# Altium PCB PCB2.PcbDoc
Units mm, origin at the board's own origin, x right, y up, seen from the top; angles counter-clockwise.
Board outline 99 x 85 mm, 2 copper layers (Top Layer, Bottom Layer); 54 components, 65 nets, 233 pads, 11 vias.
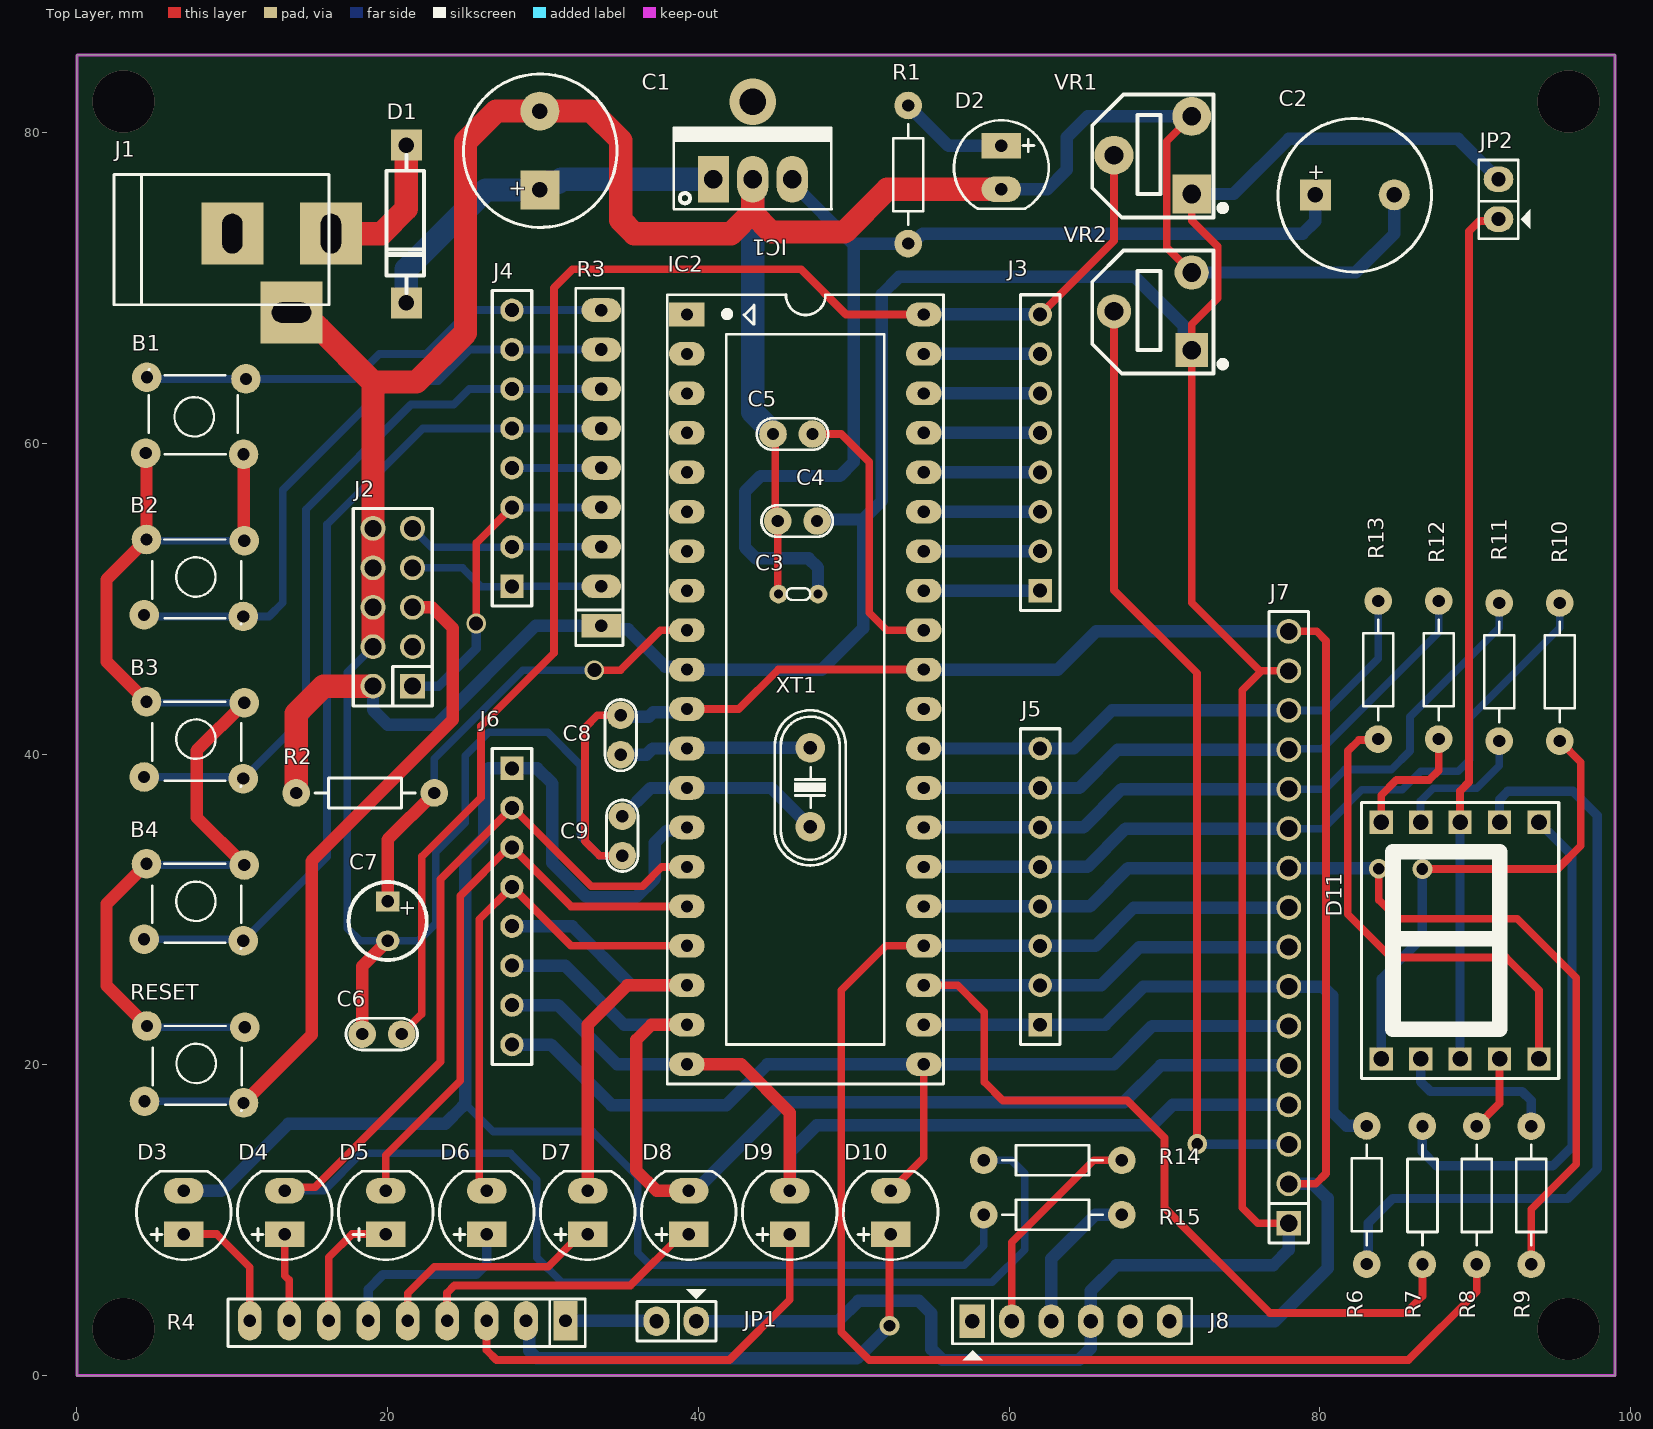
[diagram p0: Top Layer view]
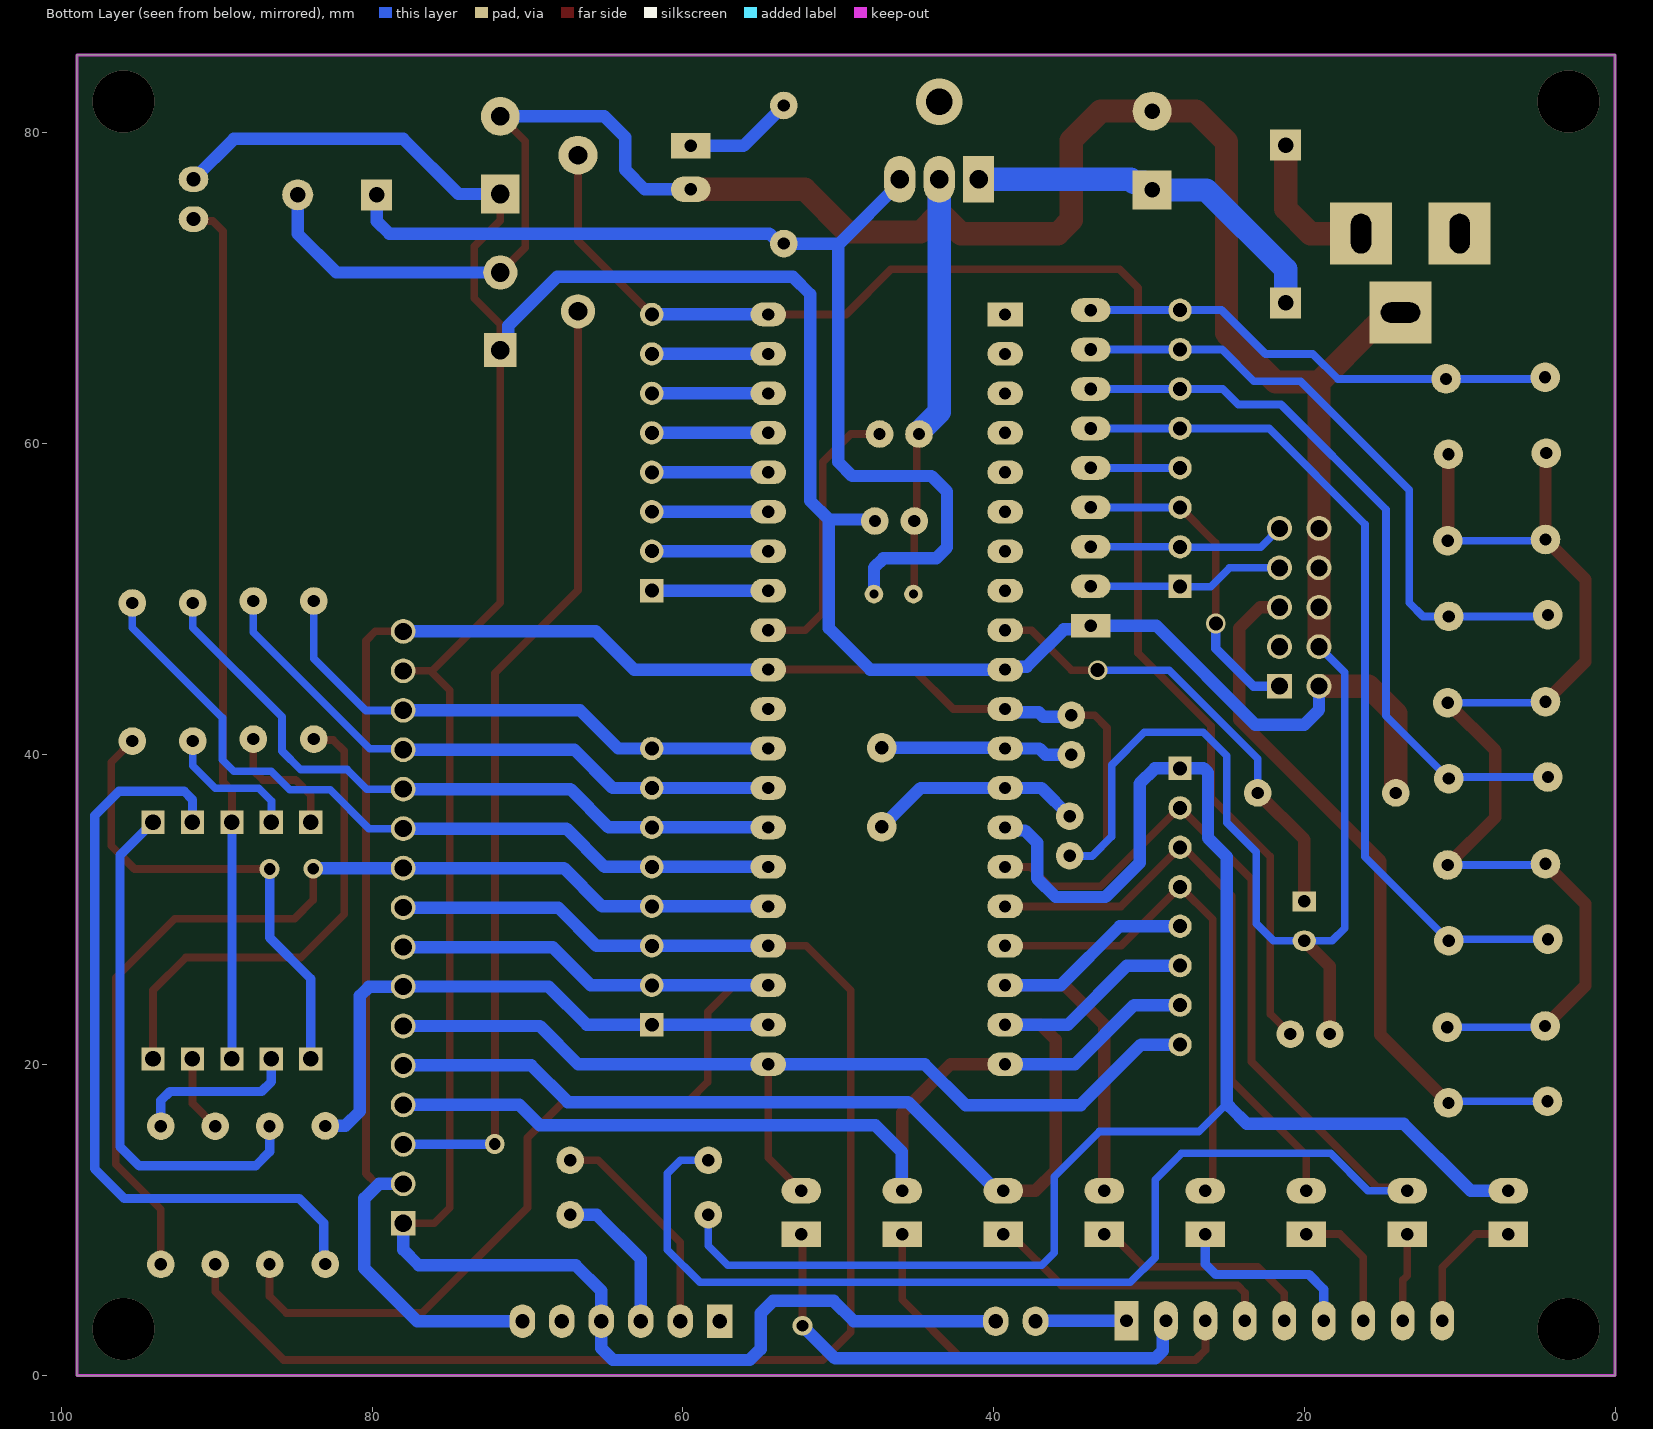
[diagram p1: Bottom Layer view, seen from below]
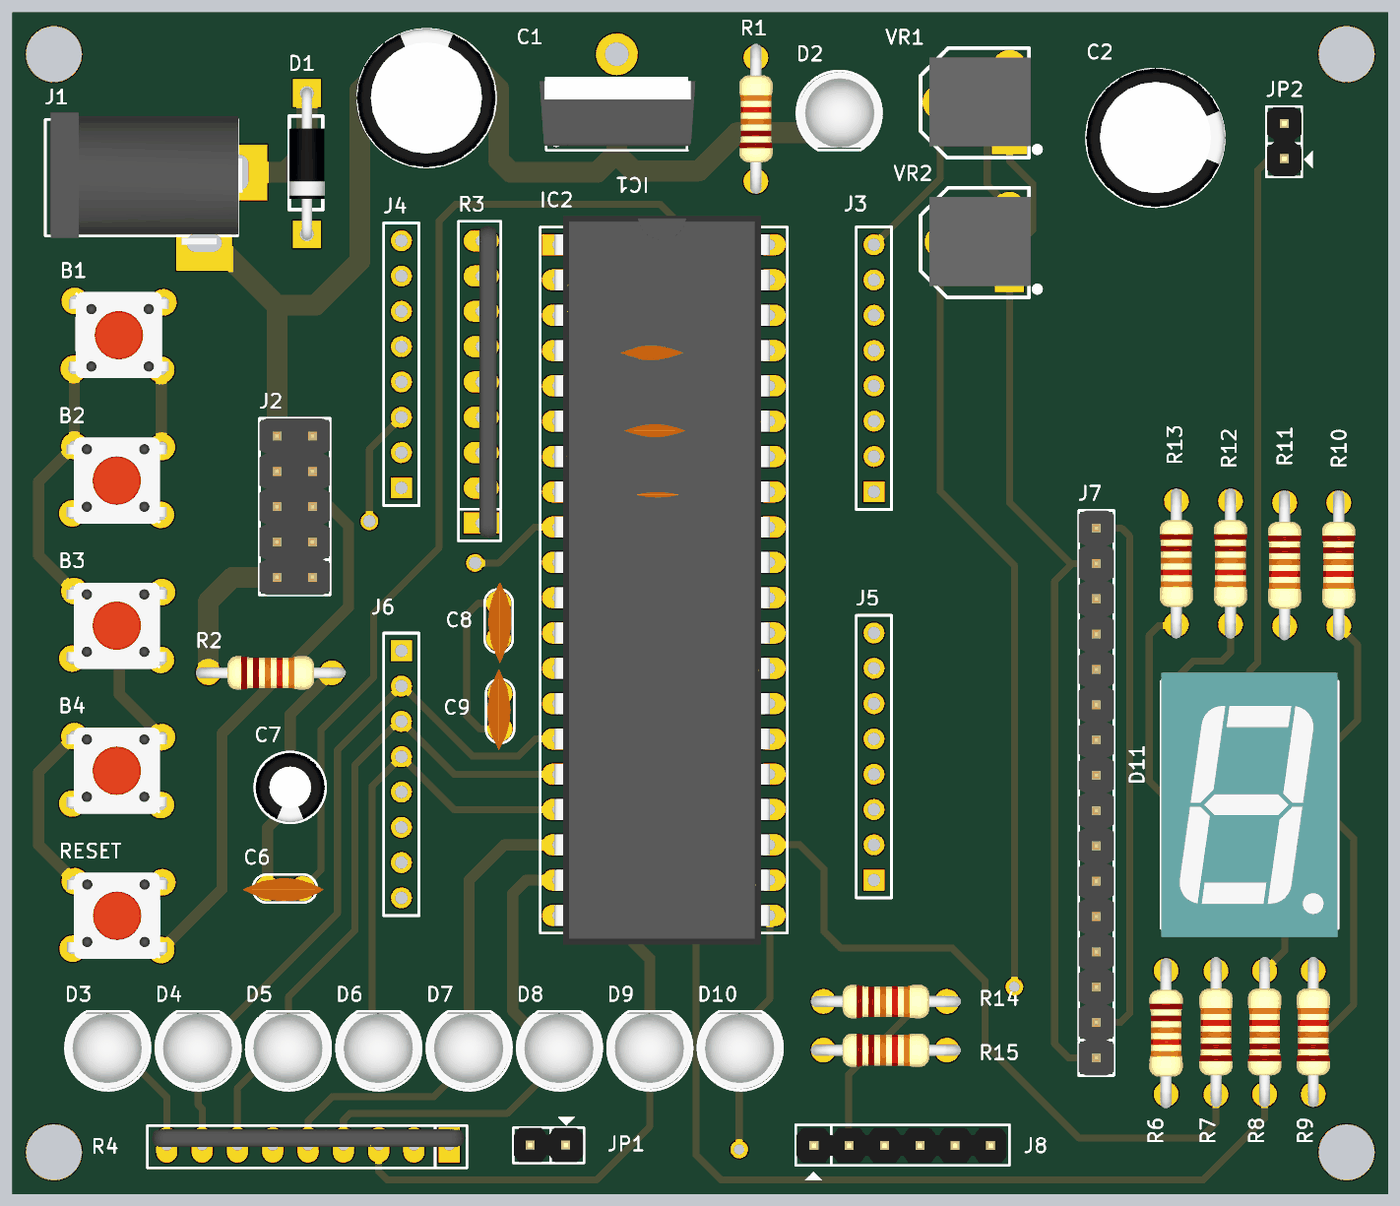
[diagram p2: 3D render of the assembled board from above, using the file's embedded part models]

## Layer stack, top to bottom
Top Solder: solder mask 0.0102, Solder Resist, Dk 3.5
Top Layer: signal copper 0.0356
Dielectric 1: dielectric 0.32, FR-4, Dk 4.8
Bottom Layer: signal copper 0.0356
Bottom Solder: solder mask 0.0102, Solder Resist, Dk 3.5

## Board outline
0,0 99,0 99,85 0,85

## Design rules (kind name [scope] priority, off if disabled: settings)
Clearance [All] p1: gap=0.3 ignorepadtopadclearanceinfootprint=FALSE
PolygonConnect [All] p1: connectstyle=Relief reliefconductorwidth=0.254 reliefentries=4 polygonreliefangle="90 Angle" airgapwidth=0.254
RoutingVias [All] p1: holewidth=0.9 width=1.27 viastyle="Through Hole" minholewidth=0.811 minwidth=1.27 maxholewidth=1 maxwidth=1.3
SolderMaskExpansion [All] p1: expansion=0.102 istentingtop=FALSE
Width [All] p1: maxlimit=1.5 minlimit=0.4 preferedwidth=0.5
30 further rules are at their usual default settings.

## Components (designator, comment, footprint, x,y, rotation, side; value= is the part's Value field where it differs from the comment)
B1 "SW" SW4 10.723,59.297 r180 top value="Button chip 4 pin"
B2 "SW" SW4 4.475,53.812 r0 top value="Button chip 4 pin"
B3 "SW" SW4 4.475,43.375 r0 top value="Button chip 4 pin"
B4 "SW" SW4 4.475,32.938 r0 top value="Button chip 4 pin"
C1 "100uF/35V" C10mm#1 29.8,78.85 r90 top
C2 "100uF/35V" C10mm#2 82.25,76 r0 top
C3 "Capacitor Ceramic" Tu-pico 45.16,50.3 r0 top value=100nF/50V
C4 "100n/50V" CN1 47.64,55 r180 top value=100pF
C5 "100n/50V" CN1 47.34,60.6 r180 top value=100pF
C6 "100n/50V" CN1 20.9,21.975 r180 top value=100pF
C7 "10uF/16V" C5mm 20,29.25 r270 top
C8 "22pF" CN1 35,42.5 r270 top value=100pF
C9 "22pF" CN1 35.1,33.46 r90 top value=100pF
D1 "Diode Power" DIODE/POW/1A 21.2,79.2 r270 top
D2 "LED" LED-5TRED 59.5,77.75 r270 top value="LED 3 ly Single Colour"
D3 "LED" LED-5TRED 6.875,10.5 r90 top value="LED 3 ly Single Colour"
D4 "LED" LED-5TRED 13.375,10.5 r90 top value="LED 3 ly Single Colour"
D5 "LED" LED-5TRED 19.875,10.5 r90 top value="LED 3 ly Single Colour"
D6 "LED" LED-5TRED 26.375,10.5 r90 top value="LED 3 ly Single Colour"
D7 "LED" LED-5TRED 32.875,10.5 r90 top value="LED 3 ly Single Colour"
D8 "LED" LED-5TRED 39.375,10.5 r90 top value="LED 3 ly Single Colour"
D9 "LED" LED-5TRED 45.875,10.5 r90 top value="LED 3 ly Single Colour"
D10 "LED" LED-5TRED 52.375,10.5 r90 top value="LED 3 ly Single Colour"
D11 "7SEG-A" LED7SEG 89,28 r0 top
IC1 "LM7805" QTO-220 40.96,77 r0 top
IC2 "ATmega16" DIP40/W0.6 39.258,68.298 r270 top value="Atmega 16L"
J1 "DC 9-12V" DC-IN 13.175,70.96 r0 top value="Jac DC"
J2 "JP5x2" JP5-D2T 20.325,49.45 r90 top
J3 "PA" HDR1X8 62,50.518 r90 top
J4 "PB" HDR1X8 28,50.8 r90 top
J5 "PC" HDR1X8 62,22.578 r90 top
J6 "PD" HDR1X8 28,39.08 r270 top
J7 "JP16" JP16-D1T 78,9.8 r90 top
J8 "JP6 PIN" JP6 57.63,3.5 r0 top value=JP7
JP1 "Jumper 2" JP2 39.865,3.5 r180 top value="JP 2"
JP2 "Jumper 2" JP2 91.5,74.435 r90 top value="JP 2"
R1 "1k" R1/4W 53.5,81.75 r270 top value="R1/4W - 1K"
R2 "10k" R1/4W 23,37.5 r180 top value="R1/4W - 1K"
R3 "10K" RN8 33.75,48.26 r90 top value="Tro thanh 10K"
R4 "10K" RN8 31.445,3.525 r180 top value="Tro thanh 10K"
R6 "1K" R1/4W 83.015,7.175 r90 top value="R1/4W - 1K"
R7 "1K" R1/4W 86.6,16.05 r270 top value="R1/4W - 1K"
R8 "1K" R1/4W 90.1,16.05 r270 top value="R1/4W - 1K"
R9 "1K" R1/4W 93.6,16.05 r270 top value="R1/4W - 1K"
R10 "1K" R1/4W 95.437,40.838 r90 top value="R1/4W - 1K"
R11 "1K" R1/4W 91.542,40.838 r90 top value="R1/4W - 1K"
R12 "1K" R1/4W 87.648,40.965 r90 top value="R1/4W - 1K"
R13 "1K" R1/4W 83.753,40.965 r90 top value="R1/4W - 1K"
R14 "100R" R1/4W 67.25,13.85 r180 top value="R1/4W - 1K"
R15 "100R" R1/4W 67.25,10.35 r180 top value="R1/4W - 1K"
RESET "SW" SW4 4.5,22.5 r0 top value="Button chip 4 pin"
VR1 "10kΩ" RES-ADJ-SMD_RM065-V1#1 69.586,78.5 r90 top
VR2 "10kΩ" RES-ADJ-SMD_RM065-V1#2 69.586,68.451 r90 top
XT1 "8Mhz" XT2 47.2,37.86 r90 top value=4Mhz

## Footprints (in the part's own frame and the unit in brackets; to place one, negate y for a bottom-side part, rotate by r counter-clockwise, add the part's x,y. Pads: shape width x height; smd on the part's side, far side on the other; paste and mask are expansions set on the pad)
C5mm [mm]
  rect 1.3x1.5 hole 0.8: 1(-1.27,0)
  oval 1.3x1.5 hole 0.8: 2(1.27,0)
  silkscreen extent -2.51,-2.51 2.51,2.51, body extent -2.5,-2.5 2.49,2.5, height 11.01
C10mm#1 [mm]
  rect 2.5x2.5 hole 1: 1(-2.54,0)
  round 2.5 hole 1: 2(2.54,0)
  silkscreen extent -4.95,-4.96 4.93,4.92, body extent -5,-5 4.97,5, height 20.01
C10mm#2 [mm]
  rect 2x2 hole 1: 1(-2.54,0)
  round 2 hole 1: 2(2.54,0)
  silkscreen extent -4.95,-4.96 4.93,4.92, body extent -5,-5 4.97,5, height 20.01
CN1 [mil]
  round 70 hole 31: 1(0,0) 2(100,0)
  silkscreen extent -40,-40 141,40, body extent -60,-30 170,37, height 265
DC-IN [mm] "Jac DC input"
  rect 4x4 hole 1.3 slot 2.54 at 90 deg: 1(3.175,2.54) 2(-3.175,2.54)
  rect 4x4 hole 1.3 slot 2.54 at 0 deg: 3(0.635,-2.54)
  silkscreen extent -10.79,-2.03 3.05,6.35, body extent -10.42,-2.67 3.4,6.84, height 11.02
DIODE/POW/1A [mm]
  rect 2x2 hole 1: 1(0,0) 2(10.16,0)
  silkscreen extent 0.64,-1.27 9.53,1.14, body extent -0.38,-1.28 10.54,1.28, height 2.55
DIP40/W0.6 [mil] "40 PIN, W 600mil, Pin to pin 100mil"
  rect 60x90 hole 31: 1(0,0)
  oval 60x90 hole 31: 2(100,0) 3(200,0) 4(300,0) 5(400,0) 6(500,0) 7(600,0) 8(700,0) 9(800,0) 10(900,0) 11(1000,0) 12(1100,0) 13(1200,0) 14(1300,0) 15(1400,0) 16(1500,0) 17(1600,0) 18(1700,0) 19(1800,0) 20(1900,0) 21(1900,600) 22(1800,600) 23(1700,600) 24(1600,600) 25(1500,600) 26(1400,600) 27(1300,600) 28(1200,600) 29(1100,600) 30(1000,600) 31(900,600) 32(800,600) 33(700,600) 34(600,600) 35(500,600) 36(400,600) 37(300,600) 38(200,600) 39(100,600) 40(0,600)
  silkscreen extent -50,-50 1950,650, body extent -82,-10 1982,600, height 224
HDR1X8 [mm] "Connector; Header; 8 Position"
  rect 1.5x1.5 hole 0.9: 1(0,0)
  round 1.5 hole 0.9: 2(2.54,0) 3(5.08,0) 4(7.62,0) 5(10.16,0) 6(12.7,0) 7(15.24,0) 8(17.78,0)
  silkscreen extent -1.27,-1.27 19.05,1.27, body extent -1.27,-1.27 19.05,1.27, height 7
JP2 [mil]
  oval 65x75 hole 36: 1(0,0) 2(101,0)
  silkscreen extent -50,-81 150,50, body extent -48,-50 148,48, height 323
JP5-D2T [mm] "10 pins, dual pin, straight, gold plating"
  rect 1.6x1.6 hole 1.1: 1(-5.08,-1.27)
  round 1.6 hole 1.1: 2(-2.54,-1.27) 3(0,-1.27) 4(2.54,-1.27) 5(5.08,-1.27) 6(5.08,1.27) 7(2.54,1.27) 8(0,1.27) 9(-2.54,1.27) 10(-5.08,1.27)
  silkscreen extent -6.35,-2.54 6.35,2.54, body extent -6.35,-2.54 6.35,2.54, height 8.55
JP6 [mil] "JP6"
  rect 65x85 hole 36: 1(0,0)
  oval 65x85 hole 36: 2(100,0) 3(200,0) 4(300,0) 5(400,0) 6(500,0)
  silkscreen extent -50,-99 556,58, body extent -48,-50 548,48, height 323
JP16-D1T [mm] "16  pins, 1 row, straight, gold plating"
  rect 1.6x1.6 hole 1.1: 1(0,0)
  round 1.6 hole 1.1: 2(2.54,0) 3(5.08,0) 4(7.62,0) 5(10.16,0) 6(12.7,0) 7(15.24,0) 8(17.78,0) 9(20.32,0) 10(22.86,0) 11(25.4,0) 12(27.94,0) 13(30.48,0) 14(33.02,0) 15(35.56,0) 16(38.1,0)
  silkscreen extent -1.27,-1.27 39.37,1.27, body extent -1.27,-1.27 39.37,1.27, height 8.54
LED7SEG [mm] "LED7SEG"
  round 1.524 on Top Overlay: 0(4.724,-5.334)
  rect 1.5x1.5 hole 1: 1(-5.055,-7.62) 2(-2.515,-7.62) 3(0.025,-7.62) 4(2.565,-7.62) 5(5.105,-7.62) 6(5.105,7.62) 7(2.565,7.62) 8(0.025,7.62) 9(-2.515,7.62) 10(-5.055,7.62)
  silkscreen extent -6.32,-8.89 6.38,8.89, body extent -6.35,-9.52 6.35,9.53, height 8.03
LED-5TRED [mil] "LED 2 PIN, 5 ly , Only colour, pin to pin 110mil"
  rect 65x100 hole 32: 1(-55,0)
  oval 65x100 hole 32: 2(55,0)
  silkscreen extent -120,-120 104,120, body extent -116,-117 98,120, height 339
QTO-220 [mm] "TO-220 - 1-2-3"
  rect 2x3 hole 1.2: 1(0,0)
  oval 2x3 hole 1.2: 2(2.54,0) 3(5.08,0)
  silkscreen extent -2.54,-1.93 7.62,3.3, body extent -3.02,-1.63 8.19,3.06, height 19.17
R1/4W [mil] "R 1/4W, 2 Pin, 350mil"
  round 70 hole 31: 1(0,0) 2(350,0)
  silkscreen extent 48,-38 302,38, body extent -40,-47 386,47, height 111
RES-ADJ-SMD_RM065-V1#1 [mm]
  rect 2.5x2.5 hole 1.2 paste+0 mask+0.05: 1(-2.451,-2.164)
  round 2.5 hole 1.2 paste+0 mask+0.05: 2(0.049,2.836) 3(2.549,-2.164)
  silkscreen extent -3.95,-4.36 3.95,4.24, body extent -3.13,-3.69 3.27,3.61, height 8.1
RES-ADJ-SMD_RM065-V1#2 [mm]
  rect 2.2x2.1 hole 1.2 paste+0 mask+0.05: 1(-2.451,-2.164)
  round 2.2 hole 1.2 paste+0 mask+0.05: 2(0.049,2.836) 3(2.549,-2.164)
  silkscreen extent -3.95,-4.36 3.95,4.24, body extent -3.13,-3.69 3.27,3.61, height 8.1
RN8 [mil] "R SIP8, 9 Pin"
  rect 60x100 hole 32: 1(0,0)
  oval 60x100 hole 32: 2(100,0) 3(200,0) 4(300,0) 5(400,0) 6(500,0) 7(600,0) 8(700,0) 9(800,0)
  silkscreen extent -50,-55 855,65, body extent -43,-44 843,5, height 259
SW4 [mil] "SW button 4pin, 250 x250 mil"
  round 75 hole 31: 1(0,0) 2(245,-195) 3(248,-3) 4(-6,-191)
  silkscreen extent 15,-215 240,0, body extent -36,-220 276,24, height 276
Tu-pico [mm] "Tu gom mini"
  round 1.2 hole 0.6: 1(0,0) 2(2.54,0)
  silkscreen extent 0.51,-0.38 2.03,0.38, body extent -1.65,-0.85 4.19,0.85, height 6.12
XT2 [mil] "Footpin for Crystal 2 pin"
  round 75 hole 34: 1(-100,0) 2(100,0)
  silkscreen extent -198,-90 195,90, body extent -233,-93 213,90, height 138

## Part data
B1 B2 B3 B4 RESET: library part SW4, "Switch button 4 pin"
C1 C2: library part "Cap Pol 8mm", "Polarized Capacitor (Axial)", LatestRevisionDate=17-Jul-2002, LatestRevisionNote="Re-released for DXP Platform.", PackageReference=POLAR0.8, Published=8-Jun-2000, Publisher="Altium Limited"
C3: library part CapCeramic, "Capacitor", LatestRevisionDate=17-Jul-2002, LatestRevisionNote="Re-released for DXP Platform.", PackageReference=RAD-0.3, Published=8-Jun-2000, Publisher="Altium Limited"
C4 C5 C6 C8 C9: library part CN1, "Cap np  1pF - 472pF"
C7: library part "Cap Pol 5mm", "Polarized Capacitor (Axial)", LatestRevisionDate=17-Jul-2002, LatestRevisionNote="Re-released for DXP Platform.", PackageReference=POLAR0.8, Published=8-Jun-2000, Publisher="Altium Limited"
D1: PackageDocument=Aug-1999, ComponentLink1Description="Manufacturer Link", ComponentLink1URL=http://www.fairchildsemi.com/, ComponentLink2Description=Datasheet, ComponentLink2URL=http://www.fairchildsemi.com/ds/1N%2F1N5400.pdf, DatasheetDocument=1998, LatestRevisionDate=17-Jul-2002, LatestRevisionNote="Re-released for DXP Platform.", PackageReference=DO-201AD, Published=8-Jun-2000, Publisher="Altium Limited"
D2 D3 D4 D5 D6 D7 D8 D9 D10: "LED Single colour Green and Red"
D11: library part LED7SEG-A, "14.2 mm General Purpose Blue 7-Segment Display: CA, RH DP, Gray Surface", Colour=Blue, PackageDocument=24-Sep-2002, ComponentLink1Description="Manufacturer Link", ComponentLink1URL=http://www.agilent.com/, DatasheetDocument=24-Sep-2002, LatestRevisionDate=17-Dec-2003, LatestRevisionNote="Schematic revised, PCB Footprint replaced.", MinimumIntensity="2020 ucd", Note="IF = 10 mA", PackageReference=H, Published=8-Jun-2000, Publisher="Altium Limited"
IC1: library part LM78xx, "On ap +, from + 5 to + 24VDC"
IC2: library part ATmega16A-PU, "8-Bit AVR Microcontroller with 16K Bytes of In-System Programmable Flash Memory"
J1: library part DCIN, "Jac DC input"
J2: "WR-PHD 2.54 mm Dual Socket Header", Manufacturer="W¨¹rth Elektronik eiSos GmbH", partNo=61301021821, ComponentLink1 Description=Manufacturer, ComponentLink1URL=http://www.we-online.com, ComponentLink2 Description=Datasheet, ComponentLink2URL=http://katalog.we-online.de/em/datasheet/6130xx21821.pdf, Created by="Karrer Zheng", Created Date="29 March 2013", NoPins=10
J3 J4 J5 J6: library part "Header 8", "Header, 8-Pin", LatestRevisionDate=17-Jul-2002, LatestRevisionNote="Re-released for DXP Platform.", Publisher="Altium Limited"
J7: "WR-PHD 2.54 mm Angled Socket Header", Manufacturer="W¨¹rth Elektronik eiSos GmbH", partNo=613016143121, ComponentLink1 Description=Manufacturer, ComponentLink1URL=http://www.we-online.com, ComponentLink2 Description=Datasheet, ComponentLink2URL=http://katalog.we-online.de/em/datasheet/6130xx143121.pdf, Created by="Karrer Zheng", Created Date="29 March 2013", NoPins=16
J8: library part JP6
JP1 JP2: library part "JP 2"
R1 R2 R6 R7 R8 R9 R10 R11 R12 R13 R14 R15: library part R, "Resistor 1/4W"
R3 R4: library part RN8, "Resistor 8 (Thanh)"
VR1 VR2: library part VR-RM065-103(10K), "VR-10K"
XT1: library part XT2, "Crystal For all Crystal 2pin."

## Via types
v1: diameter 1.27, hole 0.75, Top Layer to Bottom Layer, 4 vias
v2: diameter 4, hole 4, Top Layer to Bottom Layer, 4 vias
v3: diameter 1.27, hole 0.9, Top Layer to Bottom Layer, 2 vias
v4: diameter 3, hole 1.7, Top Layer to Bottom Layer, 1 vias

## Nets (pads, with @x,y where several pads share a name; then routed paths per layer and width w, separated by ;. In a path a pad name is that pad's centre, name@x,y a point inside that pad or via, vN(x,y) a via of type N, cw(c..) or ccw(c..) an arc to the next point about the centre after c; other vN are vias at no path point)
AVR_RX: D3.2 IC2.14 J6.1 R15.2 | length 108.2
  Bottom Layer w0.5: 25,17.5 26.8,15.7 33.2,15.7 36.1,12.8 36.1,7.9 36.9,7.1 57.1,7.1 58.36,8.36 R15.2
  Bottom Layer w0.8: D3.2 9.297,11.897 13.6,16.2 23.7,16.2 24.8,17.3 25,17.5 25,33.4 26.2,34.6 26.2,38.807 26.493,39.1 27.82,39.1 27.92,39 J6.1 29.62,39.08 30.6,38.1 30.6,33 32.8,30.8 36,30.8 37.2,32 37.2,34.3 37.982,35.082 39.062,35.082 IC2.14
AVR_TX: D4.2 IC2.15 J6.2 R14.2 | length 109.3
  Top Layer w0.5: D4.2 13.595,12.117 15.317,12.117 23.4,20.2 23.4,31.94 J6.2 28.06,36.54 33.1,31.5 36.4,31.5 37.638,32.738 IC2.15
  Bottom Layer w0.5: D4.2 15.897,11.897 18.3,14.3 27.9,14.3 29.6,12.6 29.6,7.6 31.2,6 58.9,6 61,8.1 61,13 60.15,13.85 R14.2
FT_RX: J8.2 R14.1 | length 14.3
  Top Layer w0.5: J8.2 60.17,8.57 65.45,13.85 R14.1
FT_TX: J8.3 R15.1 | length 9.7
  Bottom Layer w0.8: J8.3 62.721,3.511 62.721,7.521 65.55,10.35 R15.1
GND: C1.2 C2.2 C3.1 C4.2 C5.2 C6.2 C7.2 C8.1 C9.1 D2.2 IC1.2 IC2.11 IC2.31 J1.3 J2.6 J2.7 J2.8 J2.9 J7.2 J7.16 J8.6 VR1.3 VR2.3 | length 336.8
  Top Layer w0.5: C8.1 33.5,42.5 32.7,41.7 32.7,34.4 33.64,33.46 C9.1 ; IC2.11 42.598,42.898 45.138,45.438 IC2.31 ; C5.2 44.95,60.45 44.95,55.15 C4.2 45.1,50.36 C3.1 ; VR2.3 70.146,72.604 70.146,79.445 VR1.3 ; J7.2 79.74,12.34 80.4,13 80.4,47.3 79.8,47.9 J7.16
  Top Layer w0.8: C6.2 18.36,26.34 C7.2
  Top Layer w1.5: J1.3@14.572,68.42 15.592,67.4 15.6,67.4 19.055,63.945 ; J2.9 J2.8 J2.7 J2.6 19.055,63.945 ; IC1.2 43.5,74.9 ; D2.2 52.153,76.353 49.4,73.6 44.7,73.6 43.5,74.8 43.5,74.9 ; 19.055,63.945 21.845,63.945 25.005,67.105 25.005,79.405 26.99,81.39 C1.2 33.11,81.39 35,79.5 35,74.379 35.879,73.5 42.1,73.5 43.5,74.9
  Bottom Layer w0.5: J2.9 17.4,45.255 17.4,28.8 18.22,27.98 21.98,27.98 23.1,29.1 23.1,33.7 25,35.6 25,39.9 26.5,41.4 30.3,41.4 32.4,39.3 32.4,34.7 33.657,33.443 C9.1@35.002,33.443 ; C8.1 C8.1@35.1,42.4 ; IC2.11@39.062,42.702 IC2.11
  Bottom Layer w0.8: C8.1@35.1,42.4 36.8,42.4 37.102,42.702 IC2.11@39.062,42.702 ; IC2.31 63.138,45.438 65.6,47.9 J7.16 ; D2.2 62.453,76.353 63.7,77.6 63.7,79.7 65.049,81.049 VR1.3 ; J8.6 77.1,3.5 80.5,6.9 80.5,11.4 79.56,12.34 J7.2 ; VR2.3 82.3,71 84.79,73.49 C2.2
  Bottom Layer w1.5: IC1.2@43.5,77.254 IC1.2 43.5,62.018 44.8,60.718 C5.2
MISO: J2.5 J4.2 R3.3 | length 12.7
  Bottom Layer w0.5: J2.5 22.813,53.312 J4.2@28,53.312 ; J4.2 28.09,53.25 28.18,53.34 R3.3
MOSI: J2.1 J4.3 R3.4 | length 21
  Top Layer w0.5: v3(25.7,48.4) 25.7,53.58 J4.3
  Bottom Layer w0.5: J4.3 28.12,56 28.24,55.88 R3.4
  Bottom Layer w0.6: J2.1 23.27,44.37 25.7,46.8 v3(25.7,48.4)
NetB1_1: B1.1 B1.3 B2.1 B2.3 B3.1 B3.3 B4.1 B4.3 RESET.1 RESET.3 | length 74.6
  Top Layer w0.5: B2.3@10.723,53.787 B2.3
  Top Layer w0.8: B1.3 4.475,59.322 B2.1 1.9,51.237 1.9,45.95 B3.1 ; B4.1 1.9,30.363 1.9,25.1 RESET.1 ; B2.3@10.723,53.787 B1.1 ; B4.3 7.7,35.936 7.7,40.225 B3.3
  Bottom Layer w0.5: B4.1 4.551,32.861 B4.3 ; B3.1 4.551,43.299 B3.3 ; B2.1 4.551,53.736 B2.3 ; RESET.1 4.576,22.424 RESET.3
NetC1_1: C1.1 D1.2 IC1.1 | length 24.3
  Bottom Layer w1.5: D1.2 21.2,71.2 26.31,76.31 C1.1 30.3,76.81 30.989,76.81 31.179,77 IC1.1
NetC2_1: C2.1 C3.2 IC1.3 R1.2 | length 70.3
  Bottom Layer w0.8: IC1.3 46.04,76.746 49.926,72.86 ; C3.2 47.7,52 47.1,52.6 43.7,52.6 43,53.3 43,56.9 44,57.9 49.1,57.9 50,58.8 50,72.86 R1.2 ; R1.2@53.36,72.86 53.792,72.86 54.432,73.5 78.9,73.5 79.71,74.31 C2.1
NetC5_1: C5.1 IC2.32 | length 18.1
  Top Layer w0.5: C5.1 49.2,60.6 51,58.8 51,49.1 52.122,47.978 IC2.32
NetC7_1: C7.1 IC2.9 R2.1 | length 30.1
  Top Layer w0.5: v3(33.3,45.4) 34.98,45.4 37.558,47.978 IC2.9
  Top Layer w0.8: C7.1 20,34.5 R2.1
  Bottom Layer w0.5: R2.1 23,39.7 28.7,45.4 v3(33.3,45.4)
NetC8_2: C8.2 IC2.12 XT1.2 | length 12.4
  Bottom Layer w0.8: C8.2 36.66,39.96 37.058,40.358 IC2.12 39.3,40.4 XT1.2
NetC9_2: C9.2 IC2.13 XT1.1 | length 14
  Bottom Layer w0.8: C9.2 36.918,37.818 IC2.13 44.702,37.818 47.02,35.5 47.2,35.5 XT1.1
NetD1_1: D1.1 J1.1 | length 9.6
  Top Layer w1.5: J1.1 19.6,73.5 21.2,75.1 D1.1
NetD2_1: D2.1 R1.1 | length 7.1
  Bottom Layer w0.8: R1.1 56.103,79.147 D2.1
NetD3_1: D3.1 R4.9 | length 8.6
  Top Layer w0.5: D3.1 8.997,9.103 11.125,6.975 R4.9
NetD4_1: D4.1 R4.8 | length 5.7
  Top Layer w0.5: D4.1 13.375,6.434 13.665,6.144 R4.8
NetD5_1: D5.1 R4.7 | length 8.4
  Top Layer w0.5: R4.7 16.205,7.605 17.703,9.103 D5.1
NetD6_1: D6.1 R4.6 | length 12.3
  Bottom Layer w0.6: R4.6 18.745,5.545 19.7,6.5 25.7,6.5 26.375,7.175 D6.1
NetD7_1: D7.1 R4.5 | length 14.9
  Top Layer w0.5: R4.5 21.285,5.285 23,7 30.328,7 31.855,8.527 31.9,8.527 32.476,9.103 D7.1
NetD8_1: D8.1 R4.4 | length 18.9
  Top Layer w0.5: R4.4 23.825,5.325 24.3,5.8 35.628,5.8 38.931,9.103 D8.1
NetD9_1: D9.1 R4.3 | length 27.5
  Top Layer w0.5: R4.3 26.365,1.635 27,1 42,1 45.875,4.875 D9.1
NetD10_1: D10.1 R4.2 | length 32.3
  Top Layer w0.5: v1(52.3,3.2) 52.3,9.028 D10.1
  Bottom Layer w0.8: R4.2 28.8,3.42 29.101,3.119 29.101,1.599 29.6,1.1 50.2,1.1 v1(52.3,3.2)
NetD11_1: D11.1 R10.1 | length 31.4
  Top Layer w0.5: v1(86.6,32.6) 95.3,32.6 96.8,34.1 96.8,39.475 R10.1
  Bottom Layer w0.6: D11.1 83.945,25.545 86.6,28.2 v1(86.6,32.6)
NetD11_2: D11.2 R9.1 | length 10.7
  Bottom Layer w0.6: D11.2 86.485,18.915 87.115,18.285 93.015,18.285 93.6,17.7 R9.1
NetD11_3: D11.3 D11.8 JP2.1 | length 55.7
  Top Layer w0.5: D11.8 89.025,37.625 89.6,38.2 89.6,73.655 90.262,74.317 91.383,74.317 JP2.1
  Bottom Layer w0.6: D11.3 D11.8
NetD11_4: D11.4 R8.1 | length 4.9
  Top Layer w0.5: R8.1 91.565,17.515 D11.4
NetD11_5: D11.5 R13.1 | length 31.5
  Top Layer w0.5: R13.1 83.688,40.9 82.5,40.9 81.8,40.2 81.8,29.7 84.6,26.9 92,26.9 94.105,24.795 D11.5
NetD11_6: D11.6 R7.1 | length 33.9
  Bottom Layer w0.6: R7.1 86.6,14.4 87.5,13.5 95,13.5 96.232,14.732 96.232,33.494 D11.6
NetD11_7: D11.7 R6.1 | length 50.2
  Bottom Layer w0.6: R6.1 83.114,7.274 83.114,9.814 84.7,11.4 95.957,11.4 97.857,13.3 97.857,36.043 96.3,37.6 92.1,37.6 91.565,37.065 D11.7
NetD11_9: D11.9 R11.1 | length 9
  Bottom Layer w0.5: D11.9 86.485,36.985 87.3,37.8 90.1,37.8 91.542,39.242 R11.1
NetD11_10: D11.10 R12.1 | length 8.1
  Top Layer w0.5: D11.10 83.945,37.345 84.937,38.337 87.037,38.337 87.648,38.948 R12.1
NetJ7_3: J7.3 VR2.2 | length 61.7
  Top Layer w0.5: VR2.2 66.75,50.55 72.1,45.2 v1(72.1,14.9)
  Bottom Layer w0.5: v1(72.1,14.9) v1@72.11,14.89 ; J7.3@77.99,14.89 J7.3
  Bottom Layer w0.6: v1@72.11,14.89 J7.3@77.99,14.89
NetJP1_2: JP1.2 R4.1 | length 5.9
  Bottom Layer w0.5: JP1.2@37.275,3.525 JP1.2
  Bottom Layer w0.8: R4.1 JP1.2@37.275,3.525
PA0: C6.1 IC2.40 J3.8 VR1.2 | length 97.3
  Top Layer w0.5: C6.1 22.2,23.275 22.2,33.4 26,37.2 26,41.8 30.7,46.5 30.7,70 31.9,71.2 46.6,71.2 49.502,68.298 IC2.40 ; J3.8 66.75,73.048 VR1.2
  Bottom Layer w0.8: IC2.40 J3.8
PA1: IC2.39 J3.7 | length 7.5
  Bottom Layer w0.8: IC2.39 J3.7
PA2: IC2.38 J3.6 | length 7.5
  Bottom Layer w0.8: IC2.38 J3.6
PA3: IC2.37 J3.5 | length 7.5
  Bottom Layer w0.8: IC2.37 J3.5
PA4: IC2.36 J3.4 | length 7.5
  Bottom Layer w0.8: IC2.36 J3.4
PA5: IC2.35 J3.3 | length 7.5
  Bottom Layer w0.8: IC2.35 J3.3
PA6: IC2.34 J3.2 | length 7.5
  Bottom Layer w0.8: IC2.34 J3.2
PA7: IC2.33 J3.1 | length 7.5
  Bottom Layer w0.8: IC2.33 J3.1
PB0: B1.2 B1.4 J4.8 R3.9 | length 31.2
  Bottom Layer w0.5: B1.2 4.602,64.148 B1.4 17.848,64.148 19.45,65.75 22.5,65.75 25.33,68.58 J4.8 28,68.552 28.028,68.58 R3.9
PB1: B2.2 B2.4 J4.7 R3.8 | length 40.7
  Bottom Layer w0.5: B2.4 4.424,48.859 B2.2 12.359,48.859 13.25,49.75 13.25,57 20.25,64 23.25,64 25.29,66.04 J4.7 ; J4.7@28.17,66.04 R3.8
PB2: B3.2 B3.4 J4.6 R3.7 | length 47.6
  Bottom Layer w0.5: B3.4 10.596,38.524 B3.2 14.75,42.474 14.75,55.75 21.5,62.5 24.25,62.5 25.25,63.5 J4.6 ; J4.6@28.014,63.5 R3.7
PB3: B4.2 B4.4 J4.5 R3.6 | length 55.7
  Bottom Layer w0.5: B4.4 10.596,28.086 B4.2 16.1,33.387 16.1,54.8 22.26,60.96 J4.5 R3.6
PB4: J4.4 R3.5 | length 5.8
  Bottom Layer w0.5: J4.4 28.08,58.5 28.16,58.42 R3.5
PC0: IC2.22 J5.1 J7.7 R6.2 | length 37.6
  Bottom Layer w0.8: IC2.22 J5.1 66.178,22.578 68.64,25.04 J7.7 78.02,25.02 80.212,25.02 80.8,24.432 80.8,17 81.716,16.084 82.996,16.084 R6.2
PC1: IC2.23 J5.2 J7.8 R7.2 | length 73.1
  Top Layer w0.5: IC2.23 56.682,25.118 58.4,23.4 58.4,18.9 59.6,17.7 67.6,17.7 70,15.3 70,10.8 76.77,4.03 85.53,4.03 86.6,5.1 R7.2
  Bottom Layer w0.8: IC2.23 J5.2 65.918,25.118 68.38,27.58 J7.8
PC2: IC2.24 J5.3 J7.9 R8.2 | length 98.2
  Top Layer w0.5: IC2.24 52.058,27.658 49.2,24.8 49.2,2.8 51,1 85.7,1 90.1,5.4 R8.2
  Bottom Layer w0.8: IC2.24 J5.3 65.558,27.658 68.02,30.12 J7.9
PC3: IC2.25 J5.4 J7.10 R9.2 | length 66.8
  Top Layer w0.5: v1(83.785,32.615) 83.785,30.615 85,29.4 92.7,29.4 96.5,25.6 96.5,13.6 93.6,10.7 R9.2
  Bottom Layer w0.8: IC2.25 J5.4 65.198,30.198 67.66,32.66 J7.10 83.74,32.66 v1(83.785,32.615)
PC4: IC2.26 J5.5 J7.11 R10.2 | length 50.5
  Bottom Layer w0.5: J7.11 80.2,35.2 82.7,37.7 85.3,37.7 86.5,38.9 88.9,38.9 89.639,39.639 89.639,42.339 95.437,48.137 R10.2
  Bottom Layer w0.8: IC2.26 J5.5 65.038,32.738 67.5,35.2 J7.11
PC5: IC2.27 J5.6 J7.12 R11.2 | length 45.2
  Bottom Layer w0.5: J7.12 80.34,37.74 81.6,39 84.6,39 85.8,40.2 85.8,42.4 91.542,48.142 R11.2
  Bottom Layer w0.8: IC2.27 J5.6 64.778,35.278 67.24,37.74 J7.12
PC6: IC2.28 J5.7 J7.13 R12.2 | length 39.3
  Bottom Layer w0.5: J7.13@78.07,40.35 80.15,40.35 87.648,47.848 R12.2@87.648,49.855
  Bottom Layer w0.8: IC2.28 J5.7 64.518,37.818 66.98,40.28 J7.13 J7.13@78.07,40.35
PC7: IC2.29 J5.8 J7.14 R13.2 | length 35.4
  Bottom Layer w0.5: J7.14@78.02,42.8 80.4,42.8 83.753,46.153 R13.2
  Bottom Layer w0.8: IC2.29 64.158,40.358 66.62,42.82 J7.14 J7.14@78.02,42.8
PD2: D5.2 IC2.16 J6.3 | length 38.4
  Top Layer w0.5: D5.2 19.875,14.175 24.667,18.967 24.667,30.867 27.8,34 J6.3 31.802,30.198 IC2.16
PD3: D6.2 IC2.17 J6.4 | length 33.5
  Top Layer w0.5: D6.2 25.9,12.372 25.9,29.36 J6.4 31.802,27.658 IC2.17
PD4: D7.2 IC2.18 J6.5 | length 30.9
  Top Layer w0.8: D7.2 32.875,22.575 35.418,25.118 IC2.18
  Bottom Layer w0.8: J6.5 31.88,28.92 35.682,25.118 IC2.18
PD5: D8.2 IC2.19 J6.6 J7.5 | length 70.8
  Top Layer w0.8: IC2.19 36.978,22.578 36,21.6 36,13.2 37.303,11.897 D8.2
  Bottom Layer w0.8: J6.6 31.42,26.38 35.222,22.578 IC2.19 ; D8.2 39.82,11.897 45.523,17.6 67.4,17.6 69.76,19.96 J7.5
PD6: D9.2 IC2.20 J6.7 J7.4 | length 61.6
  Top Layer w0.8: IC2.20 42.762,20.038 45.875,16.925 D9.2
  Bottom Layer w0.8: J6.7 30.96,23.84 34.762,20.038 IC2.20 ; D9.2 45.9,11.922 45.9,14.4 47.6,16.1 69.2,16.1 70.52,17.42 J7.4
PD7: D10.2 IC2.21 J6.8 J7.6 | length 62.7
  Top Layer w0.5: D10.2 54.498,14.02 IC2.21
  Bottom Layer w0.8: J6.8 30.5,21.3 34.4,17.4 41.8,17.4 44.438,20.038 IC2.21 66.738,20.038 69.2,22.5 J7.6
RESET: J2.3 RESET.2 RESET.4 | length 45.7
  Top Layer w0.8: RESET.2 15.1,21.924 15.1,33.115 24.2,42.215 24.2,48.1 22.85,49.45 J2.3
  Bottom Layer w0.5: RESET.4 10.621,17.649 RESET.2
SCK: J2.4 J4.1 R3.2 | length 12.7
  Bottom Layer w0.5: J2.4 24.81,51.99 26.028,50.772 J4.1@28,50.772 ; J4.1 J4.1@28,50.772 ; R3.2 28.028,50.8 J4.1@28,50.772
VCC: C4.1 IC2.10 J2.10 J7.1 J7.15 J8.4 JP1.1 JP2.2 R2.2 R3.1 VR1.1 VR2.1 | length 241.4
  Top Layer w0.5: VR1.1 71.75,74.343 73.422,72.671 73.422,69.339 71.75,67.667 VR2.1 71.75,49.75 76.14,45.36 76.26,45.36 ; J7.1 76,9.8 75,10.8 75,44.1 76.26,45.36 ; J7.15 76.26,45.36
  Top Layer w1.5: R2.2 14.11,42.61 15.87,44.37 J2.10
  Bottom Layer w0.8: J2.10 19.055,42.845 20,41.9 23.162,41.9 29.522,48.26 R3.1 33.987,48.023 35.477,48.023 37.866,45.634 39.062,45.634 IC2.10 47.938,45.438 50.6,48.1 50.6,55.1 ; JP1.1 49,3.5 50.3,4.8 54.2,4.8 55,4 55,1.7 55.7,1 64.5,1 65.25,1.75 J8.4 65.25,5.45 66.9,7.1 77,7.1 78,8.1 J7.1 ; C4.1@48.3,55.1 50.6,55.1 ; VR2.1 71.243,66.507 71.243,67.557 68.089,70.711 52.911,70.711 51.8,69.6 51.8,56.3 50.6,55.1 ; VR1.1 74.449,76.049 78,79.6 88.9,79.6 JP2.2
pads on no net: D11.0 IC2.1 IC2.2 IC2.3 IC2.4 IC2.5 IC2.6 IC2.7 IC2.8 IC2.30 J1.2 J2.2 J8.1 J8.5
copper on no net:
  other v2: 3,3 96,3 3,82 96,82
  other v4: 43.5,82

## Keep-outs
Keep-Out Layer:
  the board outline again, w0.2

## Text inside footprints (layer, text, board x,y; h text height)
C1: Top Overlay "+" at 28.784,75.802 h1 r90
C2: Top Overlay "+" at 79.202,77.016 h1
C7: Top Overlay "+" at 20.838,30.647 h1 r270